# Altium PCB ThrowBot_TX_Main_Board.PcbDoc
Units mm, origin at the board's own origin, x right, y up, seen from the top; angles counter-clockwise.
Board outline 100.49 x 48.06 mm, 2 copper layers (Top Layer, Bottom Layer); 61 components, 46 nets, 211 pads, 53 vias.
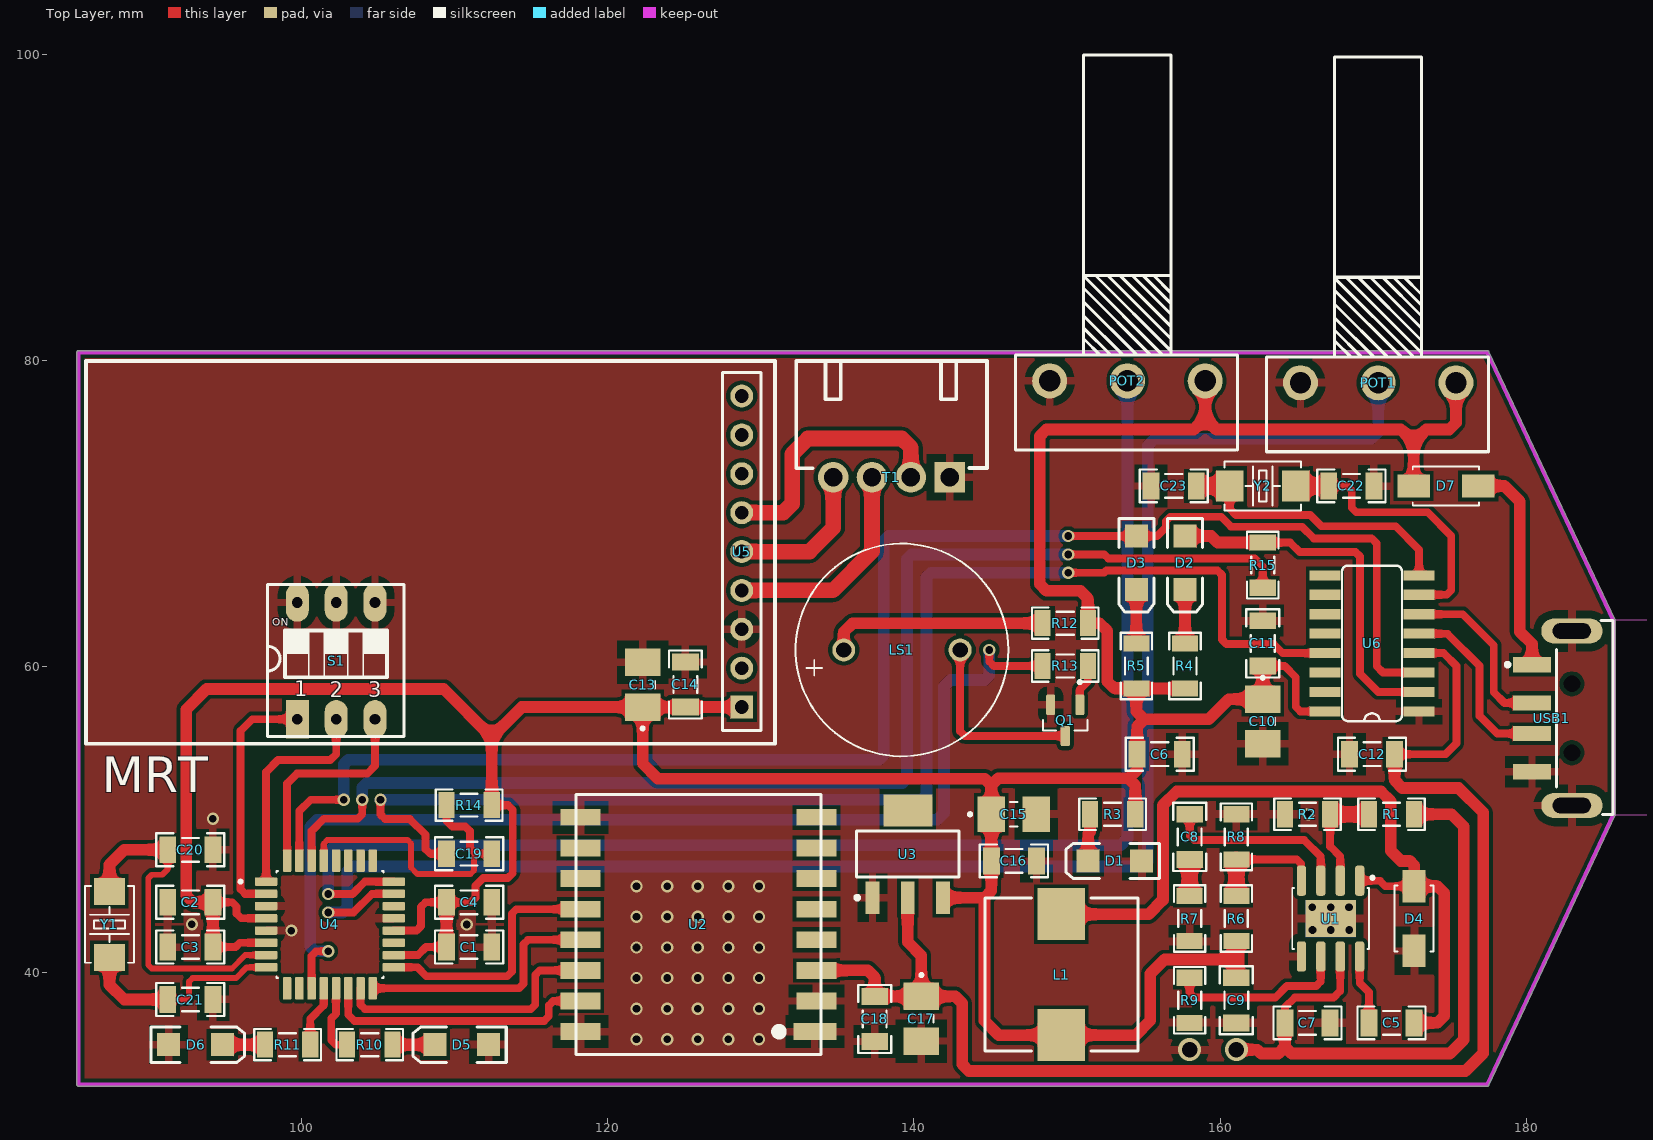
[diagram p0: Top Layer view]
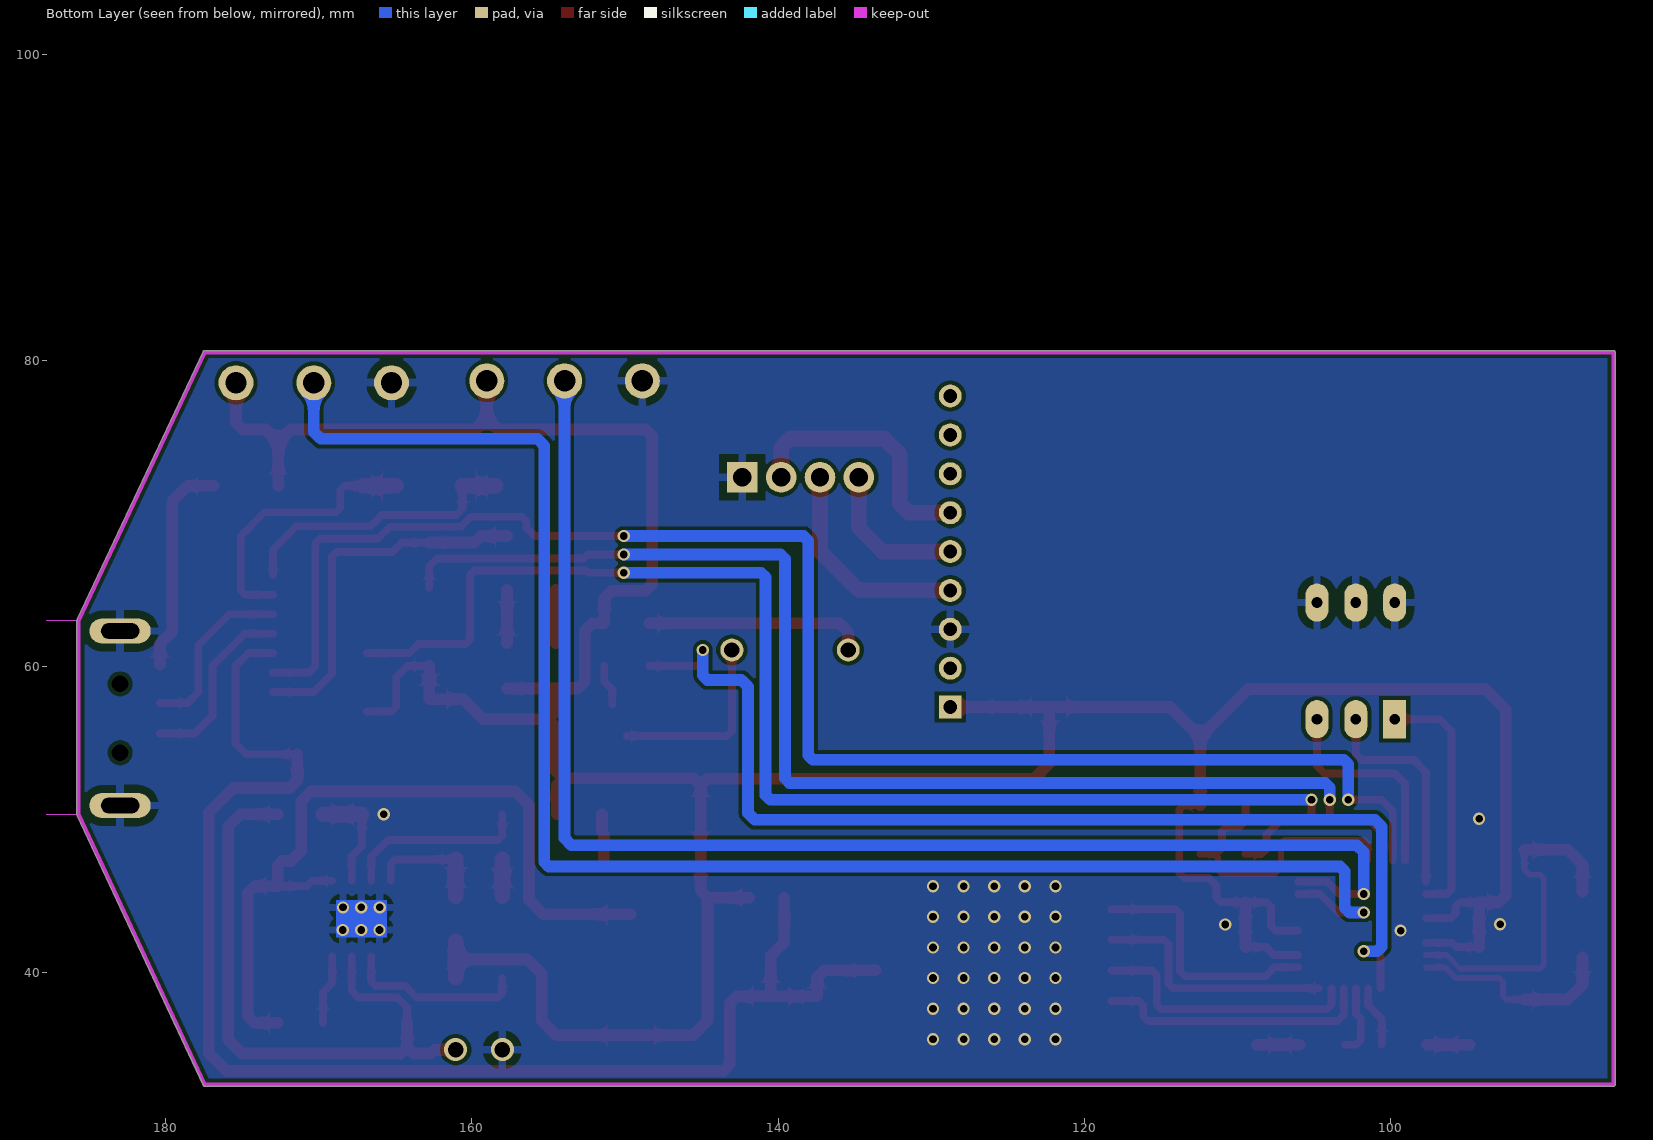
[diagram p1: Bottom Layer view, seen from below]
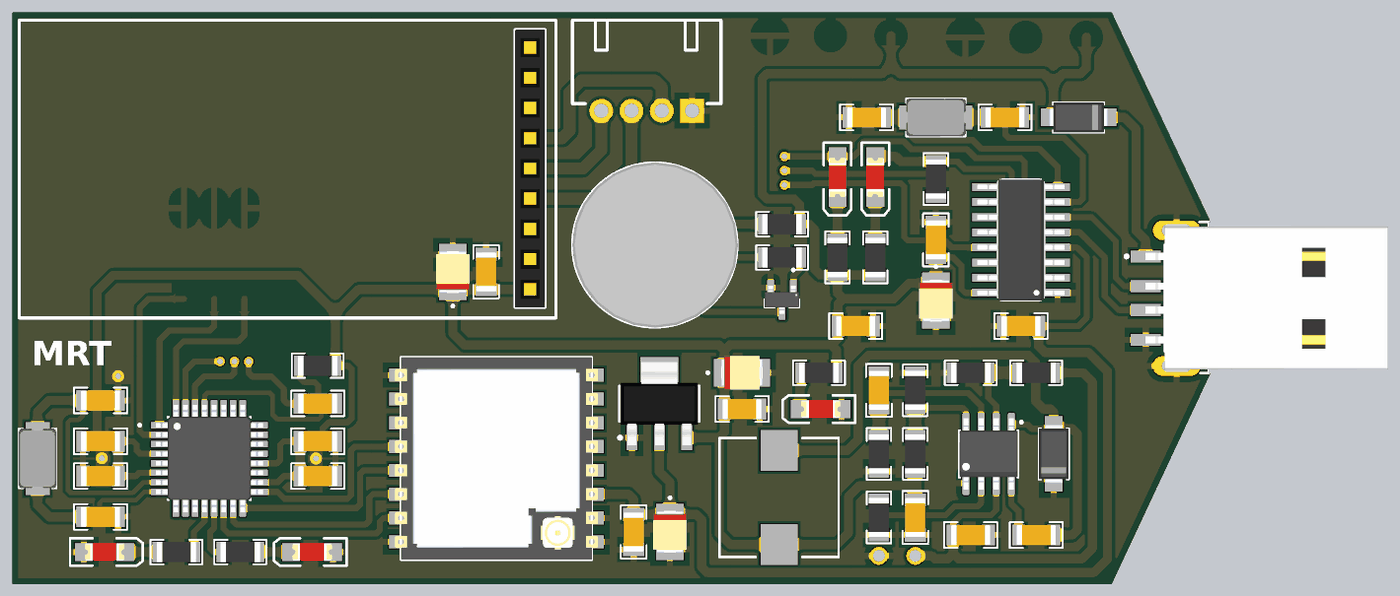
[diagram p2: 3D render of the assembled board from above, using the file's embedded part models]

## Layer stack, top to bottom
Top Solder: solder mask 0.0102, Solder Resist, Dk 3.5
Top Layer: signal copper 0.0356
Dielectric 1: dielectric 0.32, FR-4, Dk 4.8
Bottom Layer: signal copper 0.0356
Bottom Solder: solder mask 0.0102, Solder Resist, Dk 3.5

## Board outline
85.32,32.718 ccw(c85.447,32.718) 85.447,32.591 177.447,32.591 ccw(c177.447,32.718) 177.563,32.664 185.799,50.276 185.811,50.33 185.811,63.03 185.799,63.084 177.563,80.575 ccw(c177.447,80.521) 177.447,80.648 85.447,80.648 ccw(c85.447,80.521) 85.32,80.521

## Design rules (kind name [scope] priority, off if disabled: settings)
Clearance [All] p1: gap=0.254 ignorepadtopadclearanceinfootprint=FALSE except(0: Arc-Hole Track-Hole SMDPad-Hole THPad-Hole Via-Hole Fill-Hole Poly-Hole Region-Hole Text-Hole; 0.127: SMDPad-SMDPad)
ComponentClearance [All] p1: gap=0 collisioncheckmode=3 verticalgap=0 showdistances=FALSE
PolygonConnect [All] p1: connectstyle=Relief reliefconductorwidth=0.508 reliefentries=4 polygonreliefangle="90 Angle" airgapwidth=0.508
RoutingVias [All] p1: holewidth=0.8 width=0.8 viastyle="Through Hole" minholewidth=0.5 minwidth=0.5 maxholewidth=2 maxwidth=2
SilkToSilkClearance [All] p1: silktosilkclearance=0
SilkToSolderMaskClearance [IsPad] p1: minsilkscreentomaskgap=0 clearancetoexposedcopper=TRUE
SolderMaskExpansion [All] p1: expansion=0.102 istentingtop=FALSE
UnRoutedNet [All] p1: checkbadconnections=TRUE
UnpouredPolygon [All] p1: allowunpoured=TRUE
Width [All] p1: maxlimit=1.27 minlimit=0.254 preferedwidth=0.762
25 further rules are at their usual default settings.

## Components (designator, comment, footprint, x,y, rotation, side; value= is the part's Value field where it differs from the comment)
C1 "Cap" "CAP 1206" 110.947,41.686 r0 top
C2 "Cap" "CAP 1206" 92.734,44.607 r180 top
C3 "Cap" "CAP 1206" 92.734,41.686 r180 top
C4 "Cap" "CAP 1206" 110.947,44.607 r0 top
C5 "Cap" "CAP 1206" 171.203,36.731 r180 top
C6 "Cap" "CAP 1206" 156.059,54.284 r0 top
C7 "Cap" "CAP 1206" 165.713,36.731 r180 top
C8 "Cap" "CAP 1206" 158.015,48.884 r90 top
C9 "Cap" "CAP 1206" 161.063,38.206 r90 top
C10 "Cap BiPolar" "CAP Tantalum Size B" 162.79,56.42 r270 top
C11 "Cap" "CAP 1206" 162.79,61.523 r90 top
C12 "Cap" "CAP 1206" 169.928,54.284 r180 top
C13 "Cap BiPolar" "CAP Tantalum Size B" 122.279,58.821 r90 top
C14 "Cap" "CAP 1206" 125.073,58.836 r90 top
C15 "Cap BiPolar" "CAP Tantalum Size B" 146.521,50.359 r0 top
C16 "Cap" "CAP 1206" 146.536,47.311 r0 top
C17 "Cap BiPolar" "CAP Tantalum Size B" 140.489,37.001 r270 top
C18 "Cap" "CAP 1206" 137.441,36.986 r270 top
C19 "Cap" "CAP 1206" 110.947,47.782 r180 top
C20 "Cap" "CAP 1206" 92.734,48.036 r180 top
C21 "Cap" "CAP 1206" 92.734,38.257 r180 top
C22 "Cap" "CAP 1206" 168.582,71.81 r180 top
C23 "Cap" "CAP 1206" 156.974,71.81 r0 top
D1 "LED" "LED 1206" 153.134,47.311 r180 top
D2 "LED" "LED 1206" 157.71,66.782 r270 top
D3 "LED" "LED 1206" 154.535,66.782 r270 top
D4 "SS34" SS34 172.678,43.545 r90 top
D5 "LED" "LED 1206" 110.472,35.306 r180 top
D6 "LED" "LED 1206" 93.071,35.306 r0 top
D7 "SS34" SS34 174.756,71.81 r180 top
L1 "Inductor" "IND 10uH" 149.633,39.882 r270 top value=10uH
LS1 "Buzzer-5V" Buzzer-5V 139.219,61.091 r0 top
POT1 "Pot" Pot 279.298,136.961 r180 top
POT2 "Pot" Pot 262.915,137.088 r180 top
Q1 "BC847" BC847-SOT23 149.887,56.492 r270 top
R1 "Resistor" "RES 1206" 171.203,50.359 r0 top
R2 "Resistor" "RES 1206" 165.713,50.359 r180 top
R3 "Resistor" "RES 1206" 152.984,50.359 r0 top
R4 "Resistor" "RES 1206" 157.71,60.048 r90 top
R5 "Resistor" "RES 1206" 154.535,60.048 r90 top
R6 "Resistor" "RES 1206" 161.063,43.545 r270 top
R7 "Resistor" "RES 1206" 158.015,43.545 r90 top
R8 "Resistor" "RES 1206" 161.063,48.884 r270 top
R9 "Resistor" "RES 1206" 158.015,38.206 r90 top
R10 "Resistor" "RES 1206" 104.453,35.306 r180 top
R11 "Resistor" "RES 1206" 99.09,35.306 r0 top
R12 "Resistor" "RES 1206" 149.887,62.842 r0 top
R13 "Resistor" "RES 1206" 149.887,60.048 r0 top
R14 "Resistor" "RES 1206" 110.947,50.957 r0 top
R15 "Resistor" "RES 1206" 162.79,66.632 r270 top
S1 "DIP Switch x3" "DIP Switch x3" 29.997,19.613 r0 top
T1 "4 Pin Socket" XH-4AW 137.265,72.367 r180 top
U1 "MP1584EN" MP1584EN 167.217,43.545 r270 top
U2 "RA-02" RA-02 125.93,43.159 r180 top
U3 "AMS1117" AMS1117 139.6,47.757 r90 top
U4 "ATMEGA328P-AU" ATmega328 101.854,43.159 r0 top
U5 "RapidFire" RapidFire 92.307,44.915 r0 top
U6 "CH340G" CH340G 169.928,61.523 r180 top
USB1 "USB-A" USB-A-SMD 138.693,50.661 r0 top
Y1 "XTAL" Crystal-5032 87.449,43.159 r270 top
Y2 "XTAL" Crystal-5032 162.79,71.81 r180 top

## Footprints (in the part's own frame and the unit in brackets; to place one, negate y for a bottom-side part, rotate by r counter-clockwise, add the part's x,y. Pads: shape width x height; smd on the part's side, far side on the other; paste and mask are expansions set on the pad)
AMS1117 [mm]
  rect 2.1x0.9 smd: 1(-2.85,2.3) 2(-2.85,0) 3(-2.85,-2.3)
  rect 2.1x3.2 smd: 4(2.85,0)
  silkscreen extent -2.97,-3.35 1.5,3.42, body extent -3.49,-3.24 3.49,3.24, height 1.64
ATmega328 [mm]
  rrect25% 1.47x0.55 smd: 1(-4.17,2.8) 2(-4.17,2) 3(-4.17,1.2) 4(-4.17,0.4) 5(-4.17,-0.4) 6(-4.17,-1.2) 7(-4.17,-2) 8(-4.17,-2.8) 17(4.17,-2.8) 18(4.17,-2) 19(4.17,-1.2) 20(4.17,-0.4) 21(4.17,0.4) 22(4.17,1.2) 23(4.17,2) 24(4.17,2.8)
  rrect25% 0.55x1.47 smd: 9(-2.8,-4.17) 10(-2,-4.17) 11(-1.2,-4.17) 12(-0.4,-4.17) 13(0.4,-4.17) 14(1.2,-4.17) 15(2,-4.17) 16(2.8,-4.17) 25(2.8,4.17) 26(2,4.17) 27(1.2,4.17) 28(0.4,4.17) 29(-0.4,4.17) 30(-1.2,4.17) 31(-2,4.17) 32(-2.8,4.17)
  silkscreen extent -5.94,-3.5 3.5,3.5, body extent -4.5,-4.5 4.5,4.5, height 1.2
BC847-SOT23 [mm]
  rrect25% 1.32x0.59 smd: 1(-1.015,0.95) 2(-1.015,-0.95) 3(1.015,0)
  silkscreen extent -2.6,-1.46 0.65,1.46, body extent -1.18,-1.45 1.18,1.45, height 1.3
Buzzer-5V [mm]
  round 1.508 hole 1: N(3.8,0)
  round 1.5 hole 1: P(-3.8,0)
  silkscreen extent -6.95,-6.95 6.95,6.95, body extent -6.92,-6.94 6.98,6.94, height 7.5
"CAP 1206" [mm]
  rect 1.1x1.75 smd: 1(-1.475,0) 2(1.475,0)
  silkscreen extent -2.22,-1.07 2.22,1.07, body extent -1.65,-0.85 1.65,0.85, height 0.94
"CAP Tantalum Size B" [mm]
  rect 1.79x2.31 smd: 1(-1.46,0) 2(1.46,0)
  silkscreen extent -2.95,-0.8 0.25,0.8, body extent -1.75,-1.4 1.75,1.4, height 2.1
CH340G [mil]
  rect 80x26 smd: 1(-121,175) 2(-121,125) 3(-121,75) 4(-121,25) 5(-121,-25) 6(-121,-75) 7(-121,-125) 8(-121,-175) 9(121,-175) 10(121,-125) 11(121,-75) 12(121,-25) 13(121,25) 14(121,75) 15(121,125) 16(121,175)
  silkscreen extent -77,-200 77,200, body extent -144,-201 144,201, height 39
Crystal-5032 [mil]
  rect 70x80 smd: 1(-85,0) 2(85,0)
  silkscreen extent -98,-63 98,63, body extent -98,-63 98,63, height 59
"DIP Switch x3" [mm]
  rect 1.5x2.5 hole 0.7: 1(69.723,36.957)
  oval 1.5x2.5 hole 0.7: 2(72.263,36.957) 3(74.803,36.957) 4(74.803,44.577) 5(72.263,44.577) 6(69.723,44.577)
  silkscreen extent 67.78,35.81 76.71,45.76, body extent 67.72,35.82 76.8,45.72, height 6.8
"IND 10uH" [mm]
  rect 3.4x3.1 smd: 1(-3.95,0) 2(3.95,0)
  silkscreen extent -5,-5 5,5, body extent -5,-5 5,5, height 3.5
"LED 1206" [mm]
  rect 1.5x1.5 smd: 1(-1.75,0) 2(1.75,0)
  silkscreen extent -2.9,-1.15 3.2,1.15, body extent -1.65,-0.72 1.65,0.73, height 1.36
MP1584EN [mm]
  rrect54% 1.97x0.6 smd: 1(-2.475,1.905) 2(-2.475,0.635) 3(-2.475,-0.635) 4(-2.475,-1.905) 5(2.475,-1.905) 6(2.475,-0.635) 7(2.475,0.635) 8(2.475,1.905)
  rect 2.41x3.3 smd paste-3: 9(0,0)
  silkscreen extent -2.77,-2.5 2,2.84, body extent -3,-2.45 3,2.45, height 1.7
Pot [mil]
  round 90 hole 55: 1(4090,2300) 2(4490,2300) 3(4290,2300)
  silkscreen extent 4007,1461 4577,2477, body extent 3981,1487 4601,2493, height 118
RA-02 [mm]
  rect 2.8x1.1 smd: 1(-7.6,7)
  rect 2.6x1.1 smd: 2(-7.7,5) 3(-7.7,3) 4(-7.7,1) 5(-7.7,-1) 6(-7.7,-3) 7(-7.7,-5) 8(-7.7,-7) 9(7.7,-7) 10(7.7,-5) 11(7.7,-3) 12(7.7,-1) 13(7.7,1) 14(7.7,3) 15(7.7,5) 16(7.7,7)
  silkscreen extent -8,-8.5 8,8.5, body extent -8.5,-8.51 8.5,8.49, height 3.3
RapidFire [mm]
  rect 1.5x1.5 hole 0.9: 1(36.449,12.446)
  round 1.5 hole 0.9: 2(36.449,14.986) 3(36.449,17.526) 4(36.449,20.066) 5(36.449,22.606) 6(36.449,25.146) 7(36.449,27.686) 8(36.449,30.226) 9(36.449,32.766)
  silkscreen extent -6.39,10.05 38.61,35.05, body extent 35.2,10.93 37.7,34.29, height 5
"RES 1206" [mm]
  rect 1.05x1.7 smd: 1(-1.475,0) 2(1.475,0)
  silkscreen extent -2.17,-1.02 2.17,1.02, body extent -1.65,-0.85 1.65,0.85, height 0.94
SS34 [mm]
  rect 2.12x1.5 smd: 1(-2.115,0) 2(2.115,0)
  silkscreen extent -2.16,-1.28 2.16,1.28, body extent -2.47,-1.25 2.47,1.25, height 2.2
USB-A-SMD [mm]
  rect 2.5x1 smd: 1(41.69,9.469) 2(41.69,6.969) 3(41.69,4.969) 4(41.69,2.469)
  oval 4x1.65 hole 1 slot 2.5 at 0 deg: 4(44.29,0.269) 4(44.29,11.669)
  round 0.8 hole 1.1 unplated: MH1(44.29,3.719) MH2(44.29,8.219)
  Keep-Out Layer board cut-out: 46.99,12.369 46.99,-0.331 62.29,-0.331 62.29,12.369
  silkscreen extent 39.97,-0.33 46.99,12.37, body extent 41.69,-0.33 61.99,12.27, height 3.13
XH-4AW [mm]
  rect 2x2 hole 1.2 paste-2539.97 mask+0.051: 1(-5.08,0)
  round 2 hole 1.2 paste-2539.97 mask+0.051: 2(-2.54,0) 3(0,0) 4(2.54,0)
  silkscreen extent -7.5,-7.6 4.95,-0.6

## Part data
C1: "AVCC Cap", Val-1=100nF, Val-2=22pF, Val-3=22uF
C2 C3: "VCC Cap", Val-1=100nF, Val-2=22pF, Val-3=22uF
C4: "AREF Cap", Val-1=100nF, Val-2=22pF, Val-3=22uF
C5 C7 C8 C9 C20 C21 C22 C23: "1206 Capacitor", Val-1=100nF, Val-2=22pF, Val-3=22uF
  C5: Val-4=10uF50V
  C7 C8 C9: Val-4=10uF, Val-5=150pF
C6 C10 C11 C12: "USB to TTL Cap"
  C6 C11 C12: Val-1=100nF, Val-2=22pF, Val-3=22uF
  C10: Val-1=10uF, Val-2=100uF, Val-3=1000uF
C13 C14: "RapidFire Cap"
  C13: Val-1=10uF, Val-2=100uF, Val-3=1000uF
  C14: Val-1=100nF, Val-2=22pF, Val-3=22uF
C15 C16 C17 C18: "3.3V Regulator Cap"
  C15: Val-1=10uF, Val-2=100uF, Val-3=1000uF
  C16 C18: Val-1=100nF, Val-2=22pF, Val-3=22uF
  C17: Val-1=22uF, Val-2=100uF, Val-3=1000uF
C19: "Programmer Cap", Val-1=100nF, Val-2=22pF, Val-3=22uF
D1 D2 D3 D5 D6: Color-1=Blue, Color-2=Red, Color-3=Green, Color-4=White
D4: "Diode Schottky 40 V 3A Surface Mount SMA", Package=None, Check_prices=https://www.snapeda.com/parts/SS34/MDD/view-part/?ref=eda, MF=MDD, MP=SS34, SnapEDA_Link=https://www.snapeda.com/parts/SS34/MDD/view-part/?ref=snap
D7: "Diode Schottky 40 V 3A Surface Mount SMA"
Q1: "NPN General-purpose Transistor", Data=27-12-2016, Desc.="Plastic Medium-Power. Silicon NPN Transistors", Designer="Abbas Basereh"
U1: "Buck Switching Regulator IC Positive Adjustable 0.8V 1 Output 3A 8-SOIC (0.154, 3.90mm Width) Exposed Pad", Package="SOIC-8 Monolithic Power", Availability="In Stock", Check_prices=https://www.snapeda.com/parts/MP1584EN/Monolithic+Power+Systems+Inc./view-part/?ref=eda, MF="Monolithic Power", MP=MP1584EN, Price=None, Purchase-URL=https://pricing.snapeda.com/search/part/MP1584EN/?ref=eda, SnapEDA_Link=https://www.snapeda.com/parts/MP1584EN/Monolithic+Power+Systems+Inc./view-part/?ref=snap
U2: "LoRa RA-02"
U3: "3V3 Regulator"
U4: "ATmega 328 Microcontroller"
Y1 Y2: "XTAL Crystal", Val-1="12 MHz", Val-2="16 MHz"
L1: Code_IEC=1005, Code_JEITA=0402, LatestRevisionDate=29-May-2009, LatestRevisionNote="IPC-7351 Footprint Added.", PackageDescription="Chip Inductor", PackageReference=0402-A, Published=8-Jun-2000, Publisher="Altium Limited"
R1 R2 R6 R7 R8 R9: Val-1=1K, Val-2=10K, Val-3=220R, Val-4=100K, Val-5=24.9K, Val-6=8.2K, Val-7=43K
R3 R10 R11 R14: Val-1=1K, Val-2=10K, Val-3=220R
R4 R5 R12 R13 R15: Val-1=1K, Val-2=10K, Val-3=220R, Val-4=100K, Val-5=24.9K, Val-6=8.2K, Val-7=43K, Val-8=150R, Val-9=100m, Val-10=6K, Val-11=4K, Val-12=1.2K

## Via types
v1: diameter 0.8, hole 0.5, Top Layer to Bottom Layer, 51 vias
v2: diameter 1.5, hole 1, Top Layer to Bottom Layer, 2 vias

## Nets (pads, with @x,y where several pads share a name; then routed paths per layer and width w, separated by ;. In a path a pad name is that pad's centre, name@x,y a point inside that pad or via, vN(x,y) a via of type N, cw(c..) or ccw(c..) an arc to the next point about the centre after c; other vN are vias at no path point)
+3V3: C12.1 C17.1 C18.1 U2.3 U3.2 U6.4 | length 92.9
  Top Layer w0.508: C12.1 174.728,54.284 175.443,54.999 175.443,60.048 174.603,60.888 U6.4
  Top Layer w0.762: U2.3 136.995,40.159 137.441,39.713 C18.1 C17.1 ; U3.2 139.6,42.017 140.489,41.128 C17.1 ; C12.1 171.403,52.577 171.91,52.07 175.593,52.07 177.19,50.473 177.19,34.748 176.026,33.583 143.601,33.583 143.154,34.03 143.154,38.015 142.708,38.461 C17.1
+5V: C1.1 C2.1 C3.1 C4.1 C6.1 C9.2 C10.1 C11.1 C13.1 C14.1 C15.1 C16.1 D7.2 L1.2 POT1.1 POT2.1 R3.2 R4.1 R5.1 R6.2 R12.2 R14.2 U3.3 U4.4 U4.6 U4.18 U4.20 U5.1 U6.16 | length 256
  Top Layer w0.508: C3.1 95.682,41.686 95.955,41.959 U4.6 ; C2.1 95.46,44.607 95.758,44.309 95.758,43.857 96.056,43.559 U4.4 ; U4.18 107.601,41.159 108.128,41.686 C1.1 ; U4.20 107.506,42.759 107.804,43.057 107.804,44.309 108.102,44.607 C4.1 111.067,44.607 111.364,44.904 111.364,45.692 111.866,46.194 113.473,46.194 113.79,46.512 113.79,50.659 113.493,50.957 R14.2 ; C11.1 164.216,60.048 164.949,59.315 164.949,57.376 165.247,57.078 U6.16
  Top Layer w0.762: C3.1 C2.1 92.906,44.607 92.46,45.053 92.46,57.205 93.801,58.547 109.273,58.547 112.422,55.398 ; C1.1 C4.1 ; R14.2 112.422,55.398 ; U5.1 C14.1 C13.1 ; U3.3 144.615,44.907 ; R3.2 154.459,52.259 154.013,52.705 ; R4.1 R5.1 ; POT2.1 159.029,76.233 ; 161.063,40.876 156.394,40.876 155.452,39.933 155.452,36.885 154.499,35.932 L1.2 145.551,35.932 144.615,36.868 144.615,44.907 ; C11.1 C10.1 160.57,57.88 159.26,56.57 155.052,56.57 ; D7.2 172.646,71.816 172.646,74.658 ; POT1.1 175.412,75.94 174.966,75.493 173.482,75.493 172.646,74.658 ; 112.422,55.398 114.385,57.361 C13.1 ; C13.1 122.279,53.675 123.272,52.682 144.638,52.682 145.061,52.259 ; 144.615,44.907 145.061,45.354 C16.1 C15.1 145.061,52.259 ; 145.061,52.259 145.508,52.705 154.013,52.705 ; 154.013,52.705 154.021,52.705 154.584,53.268 C6.1 154.584,56.103 155.052,56.57 ; R5.1 154.524,58.585 153.08,58.585 152.632,59.032 152.632,62.334 152.124,62.842 R12.2 151.362,64.47 150.88,64.952 148.659,64.952 148.213,65.399 148.213,75.047 148.659,75.493 158.289,75.493 159.029,76.233 ; R5.1 154.535,57.087 155.052,56.57 ; 159.029,76.233 159.77,75.493 171.811,75.493 172.646,74.658
  Top Layer w1.016: C9.2 161.063,40.876 R6.2
+12V: C7.2 R1.2 U1.7 | length 42.1
  Top Layer w0.508: C7.2 164.238,37.747 164.873,38.382 167.413,38.382 167.852,38.821 U1.7
  Top Layer w0.762: v2(161.063,34.98) 162.437,34.98 162.691,34.726 163.792,34.726 164.238,35.173 ; C7.2 164.238,35.173 ; R1.2 175.121,50.359 175.922,49.558 175.922,35.639 175.01,34.726 164.685,34.726 164.238,35.173
AUDL: T1.4 U5.5 | length 9.9
  Top Layer w1.016: U5.5 133.181,67.521 134.725,69.065 T1.4
AUDR: T1.3 U5.4 | length 14.4
  Top Layer w1.016: U5.4 134.705,64.981 137.265,67.541 T1.3
Buzz_C: R13.1 U4.11 | length 71.8
  Top Layer w0.508: U4.11 100.654,41.109 100.952,41.406 v1(101.744,41.406) ; v1(144.924,61.091) 144.924,60.346 145.222,60.048 R13.1
  Bottom Layer w0.762: v1(101.744,41.406) 100.858,41.406 100.56,41.704 100.56,49.544 101.007,49.99 141.516,49.99 141.962,50.437 141.962,58.688 142.409,59.134 144.627,59.134 144.924,59.432 v1(144.924,61.091)
D+: U6.5 USB1.3 | length 12
  Top Layer w0.508: U6.5 174.854,62.158 176.951,60.061 176.951,56.785 178.105,55.63 USB1.3
D-: U6.6 USB1.2 | length 11.6
  Top Layer w0.508: U6.6 175.845,63.428 177.878,61.395 177.878,58.336 178.584,57.63 USB1.2
EN: R1.1 R2.1 U1.2 | length 7.2
  Top Layer w0.508: R2.1 167.188,48.259 167.852,47.595 U1.2
  Top Layer w1.016: R2.1 R1.1
FB: R6.1 R8.2 U1.4 | length 7.9
  Top Layer w0.508: R8.2 165.015,47.409 165.312,47.111 U1.4
  Top Layer w1.016: R6.1 R8.2
GND: C1.2 C2.2 C3.2 C4.2 C6.2 C7.1 C9.1 C10.2 C11.2 C12.2 C13.2 C14.2 C15.2 C16.2 C17.2 C18.2 C20.1 C21.1 C22.1 C23.1 D1.1 D4.1 D5.1 D6.1 POT1.2 POT2.2 Q1.2 R2.2 R7.1 R8.1 R9.1 S1.4 S1.5 S1.6 T1.1 U1.5 U1.9 U2.1 U2.2 U2.9 U2.16 U3.1 U4.3 U4.5 U4.21 U5.3 U6.1 USB1.4
  other v1: 121.884,35.66 123.884,35.66 125.884,35.66 127.884,35.66 129.884,35.66 121.884,37.66 123.884,37.66 125.884,37.66 127.884,37.66 129.884,37.66 121.884,39.66 123.884,39.66 125.884,39.66 127.884,39.66 129.884,39.66 121.884,41.66 123.884,41.66 125.884,41.66 127.884,41.66 129.884,41.66 99.335,42.759 166.035,42.802 167.235,42.802 168.435,42.802 110.797,43.159 92.837,43.18 121.884,43.66 123.884,43.66 125.884,43.66 127.884,43.66 129.884,43.66 166.029,44.275 167.229,44.275 168.429,44.275 121.884,45.66 123.884,45.66 125.884,45.66 127.884,45.66 129.884,45.66 94.209,50.068 165.762,50.359
  other v2: 158.015,34.98
LED_1: R10.2 U4.13 | length 4.7
  Top Layer w0.508: U4.13 102.254,37.338 101.933,37.017 101.933,35.604 102.231,35.306 R10.2
LED_2: R11.2 U4.12 | length 4.1
  Top Layer w0.508: R11.2 100.565,36.986 101.454,37.875 U4.12
MISO: U2.13 U4.16 | length 16.4
  Top Layer w0.508: U4.16 114.202,38.989 114.5,39.287 114.5,41.861 114.797,42.159 U2.13
MOSI: U2.14 U4.15 | length 17.8
  Top Layer w0.508: U4.15 103.854,37.919 104.152,37.622 114.964,37.622 115.262,37.919 115.262,39.861 115.559,40.159 U2.14
NetC5_1: C5.1 D4.2 L1.1 U1.1 | length 51.3
  Top Layer w0.508: U1.1 170.443,46.02 170.803,45.66 D4.2
  Top Layer w0.762: L1.1 155.338,43.832 156.269,44.763 156.269,50.936 157.177,51.844 170.516,51.844 171.154,51.206 171.154,47.973 171.816,47.311 172.381,47.311 172.678,47.013 D4.2 174.206,45.66 174.652,45.214 174.652,37.177 174.206,36.731 C5.1
NetC5_2: C5.2 U1.8 | length 4.6
  Top Layer w0.508: U1.8 169.122,39.34 169.728,38.734 C5.2
NetC8_1: C8.1 R7.2 | length 2.4
  Top Layer w1.016: R7.2 C8.1
NetC8_2: C8.2 U1.3 | length 12.1
  Top Layer w0.508: C8.2 158.015,48.967 158.313,48.669 165.508,48.669 166.582,47.595 U1.3
NetC19_2: C19.2 U6.13 | length 87.8
  Top Layer w0.508: v1(105.16,51.312) 105.16,50.34 105.458,50.042 107.078,50.042 108.104,49.016 108.104,48.079 108.402,47.782 C19.2 ; v1(150.09,66.132) 152.428,66.132 152.586,66.29 159.826,66.29 160.123,65.993 160.123,61.772 160.421,61.474 163.508,61.474 164.094,60.888 U6.13
  Bottom Layer w0.762: v1(105.16,51.312) 140.522,51.312 140.819,51.61 140.819,65.835 141.117,66.132 v1(150.09,66.132)
NetD1_2: D1.2 R3.1 | length 3.1
  Top Layer w0.762: D1.2 151.384,49.091 151.509,49.216 R3.1
NetD2_2: D2.2 R4.2 | length 3.5
  Top Layer w0.762: R4.2 D2.2
NetD3_2: D3.2 R5.2 | length 3.5
  Top Layer w0.762: R5.2 D3.2
NetD5_2: D5.2 R10.1 | length 2.8
  Top Layer w0.762: R10.1 D5.2
NetD6_2: D6.2 R11.1 | length 2.8
  Top Layer w0.762: D6.2 R11.1
NetD7_1: D7.1 USB1.1 | length 14.1
  Top Layer w0.762: D7.1 178.566,71.81 179.582,70.794 179.582,62.285 180.383,61.483 USB1.1
NetLS1_N: LS1.N Q1.3 | length 12.3
  Top Layer w0.508: LS1.N 143.019,55.775 143.317,55.477 Q1.3
NetLS1_P: LS1.P R12.1 | length 14.4
  Top Layer w0.762: LS1.P 135.419,62.266 135.995,62.842 R12.1
NetQ1_1: Q1.1 R13.2 | length 2.8
  Top Layer w0.508: Q1.1 150.837,58.507 151.362,59.032 R13.2
NetR9_2: R9.2 U1.6 | length 11.8
  Top Layer w0.508: R9.2 158.015,38.68 158.313,38.382 163.603,38.382 164.365,39.144 166.285,39.144 166.582,39.442 U1.6
NSS: U2.15 U4.14 | length 18
  Top Layer w0.508: U4.14 103.054,37.256 103.451,36.86 115.853,36.86 116.151,37.157 116.151,37.861 116.448,38.159 U2.15
POT_1: POT1.3 U4.23 | length 106.9
  Top Layer w0.508: v1(101.744,43.946) 103.395,43.946 104.608,45.159 U4.23
  Bottom Layer w0.762: v1(101.744,43.946) 102.676,43.946 102.973,44.244 102.973,46.645 103.271,46.942 154.974,46.942 155.272,47.24 155.272,74.436 155.718,74.882 169.886,74.882 170.332,75.329 POT1.3
POT_2: POT2.3 U4.24 | length 89.8
  Top Layer w0.508: v1(101.744,45.146) 103.325,45.146 104.138,45.959 U4.24
  Bottom Layer w0.762: v1(101.744,45.146) 101.744,47.893 102.191,48.339 153.503,48.339 153.949,48.786 POT2.3
RST: C19.1 R14.1 U4.29 | length 19.6
  Top Layer w0.381: U4.29@101.458,47.333 101.458,48.448 101.681,48.671 106.929,48.671 107.152,48.448 107.152,46.876 107.565,46.462 111.038,46.462 111.261,46.685 111.261,47.517 111.526,47.782
  Top Layer w0.508: R14.1 109.472,49.941 109.853,49.56 110.699,49.56 110.996,49.262 110.996,48.163 111.377,47.782 111.526,47.782 C19.1
RX: D3.1 U4.31 U6.3 | length 103.1
  Top Layer w0.508: U4.31 99.854,50.573 100.594,51.312 v1(102.76,51.312) ; v1(150.09,68.532) D3.1 155.889,68.532 156.452,69.096 156.452,69.493 156.75,69.79 160.075,69.79 160.722,69.143 165.356,69.143 166.118,68.381 169.902,68.381 170.233,68.051 170.233,60.026 170.641,59.618 U6.3
  Bottom Layer w0.762: v1(102.76,51.312) 102.76,53.63 103.058,53.927 137.728,53.927 138.025,54.225 138.025,68.235 138.323,68.532 v1(150.09,68.532)
SCK: U2.12 U4.17 | length 16.5
  Top Layer w0.508: U4.17 107.571,40.359 108.15,39.781 113.44,39.781 113.738,40.078 113.738,43.861 114.035,44.159 U2.12
SW_1: S1.1 U4.2 | length 16.2
  Top Layer w0.508: U4.2 96.313,45.159 96.016,45.457 96.016,55.808 96.778,56.57 S1.1
SW_2: S1.2 U4.1 | length 14.5
  Top Layer w0.508: U4.1 97.684,53.124 98.463,53.903 101.879,53.903 102.26,54.284 S1.2
SW_3: S1.3 U4.32 | length 14.3
  Top Layer w0.508: U4.32 99.054,52.37 99.699,53.014 104.292,53.014 104.8,53.522 S1.3
TX: R15.2 U4.30 | length 82.7
  Top Layer w0.508: U4.30 100.654,49.265 101.459,50.07 103.663,50.07 103.96,50.367 v1(103.96,51.312) ; v1(150.09,67.332) 152.433,67.332 152.691,67.074 162.27,67.074 162.79,66.554 R15.2
  Bottom Layer w0.762: v1(103.96,51.312) 103.96,52.106 104.258,52.403 139.252,52.403 139.549,52.701 139.549,67.035 139.847,67.332 v1(150.09,67.332)
TX1: D2.1 R15.1 U6.2 | length 24
  Top Layer w0.508: R15.1 164.588,68.107 165.203,67.492 168.843,67.492 169.14,67.195 169.14,59.544 170.336,58.348 U6.2
  Top Layer w0.762: D2.1 159.415,68.532 159.84,68.107 R15.1
VID: T1.2 U5.6 | length 17.1
  Top Layer w1.016: U5.6 131.463,70.061 132.058,70.656 132.058,73.891 133.074,74.907 139.21,74.907 139.805,74.312 T1.2
XI: C22.2 U6.7 Y2.1 | length 18
  Top Layer w0.508: C22.2 168.309,71.81 168.607,71.513 168.607,70.381 168.905,70.083 173.562,70.083 175.109,68.535 175.109,64.996 174.812,64.698 U6.7
  Top Layer w1.016: Y2.1 C22.2
XO: C23.2 U6.8 Y2.2 | length 18.8
  Top Layer w0.508: Y2.2 160.631,70.312 161.038,69.905 165.889,69.905 166.626,69.169 171.477,69.169 173.001,67.645 U6.8
  Top Layer w1.016: C23.2 Y2.2
XTAL1: C20.2 U4.7 Y1.1 | length 22.6
  Top Layer w0.381: C20.2 91.259,46.766 90.903,46.41 90.212,46.41 89.989,46.187 89.989,40.512 90.212,40.289 95.45,40.289 96.32,41.159 U4.7
  Top Layer w0.762: Y1.1 87.449,47.063 88.421,48.036 C20.2
XTAL2: C21.2 U4.8 Y1.2 | length 13.8
  Top Layer w0.381: C21.2 92.432,38.257 92.656,38.48 92.656,39.431 92.879,39.654 95.713,39.654 96.418,40.359 U4.8
  Top Layer w0.762: Y1.2 87.449,39.229 88.421,38.257 C21.2
pads on no net: U2.4 U2.5 U2.6 U2.7 U2.8 U2.10 U2.11 U3.4 U4.9 U4.10 U4.19 U4.22 U4.25 U4.26 U4.27 U4.28 U5.2 U5.7 U5.8 U5.9 U6.9 U6.10 U6.11 U6.12 U6.14 U6.15 USB1.MH1 USB1.MH2

## Polygon pours and split planes (outlines as drawn)
GND on Top Layer "G_Top" (solid, remove dead copper, pour order 0): 85.221,80.7 185.932,80.7 185.932,32.567 85.221,32.567
GND on Bottom Layer "G_Bottom" (solid, remove dead copper, pour order 1): 85.221,80.7 185.932,80.7 185.932,32.567 85.221,32.567

## Keep-outs
Keep-Out Layer:
  lines w0.254: 85.447,32.718 85.447,80.521 177.447,80.521 185.683,63.03 185.683,50.33 177.447,32.718 85.447,32.718

## Other copper
Bottom Layer:
  rectangle net GND: 165.559,42.319 168.886,44.758

## Silkscreen, mask and mechanical layers (free items; w line width, h text height)
Top Overlay:
  text "MRT" at 86.954,51.003 h4
Bottom Solder:
  rectangle: 165.534,42.294 168.912,44.783

## Text inside footprints (layer, text, board x,y; h text height)
S1: Top Overlay "3" at 104.347,58.017 h1; Top Overlay "2" at 101.827,58.017 h1; Top Overlay "1" at 99.517,58.057 h1; Top Overlay "ON" at 98.069,62.666 h0.5
USB1: Mechanical 1 "PCB Edge" at 186.156,51.458 h0.25 r90